# Altium PCB WorldClock.PcbDoc (part 7 of 13)
Units mil, origin at the board's own origin, x right, y up, seen from the top; angles counter-clockwise.
Board outline 3700 x 3850 mil, 2 copper layers (Top Layer, Bottom Layer); 227 components, 134 nets, 1324 pads, 248 vias.
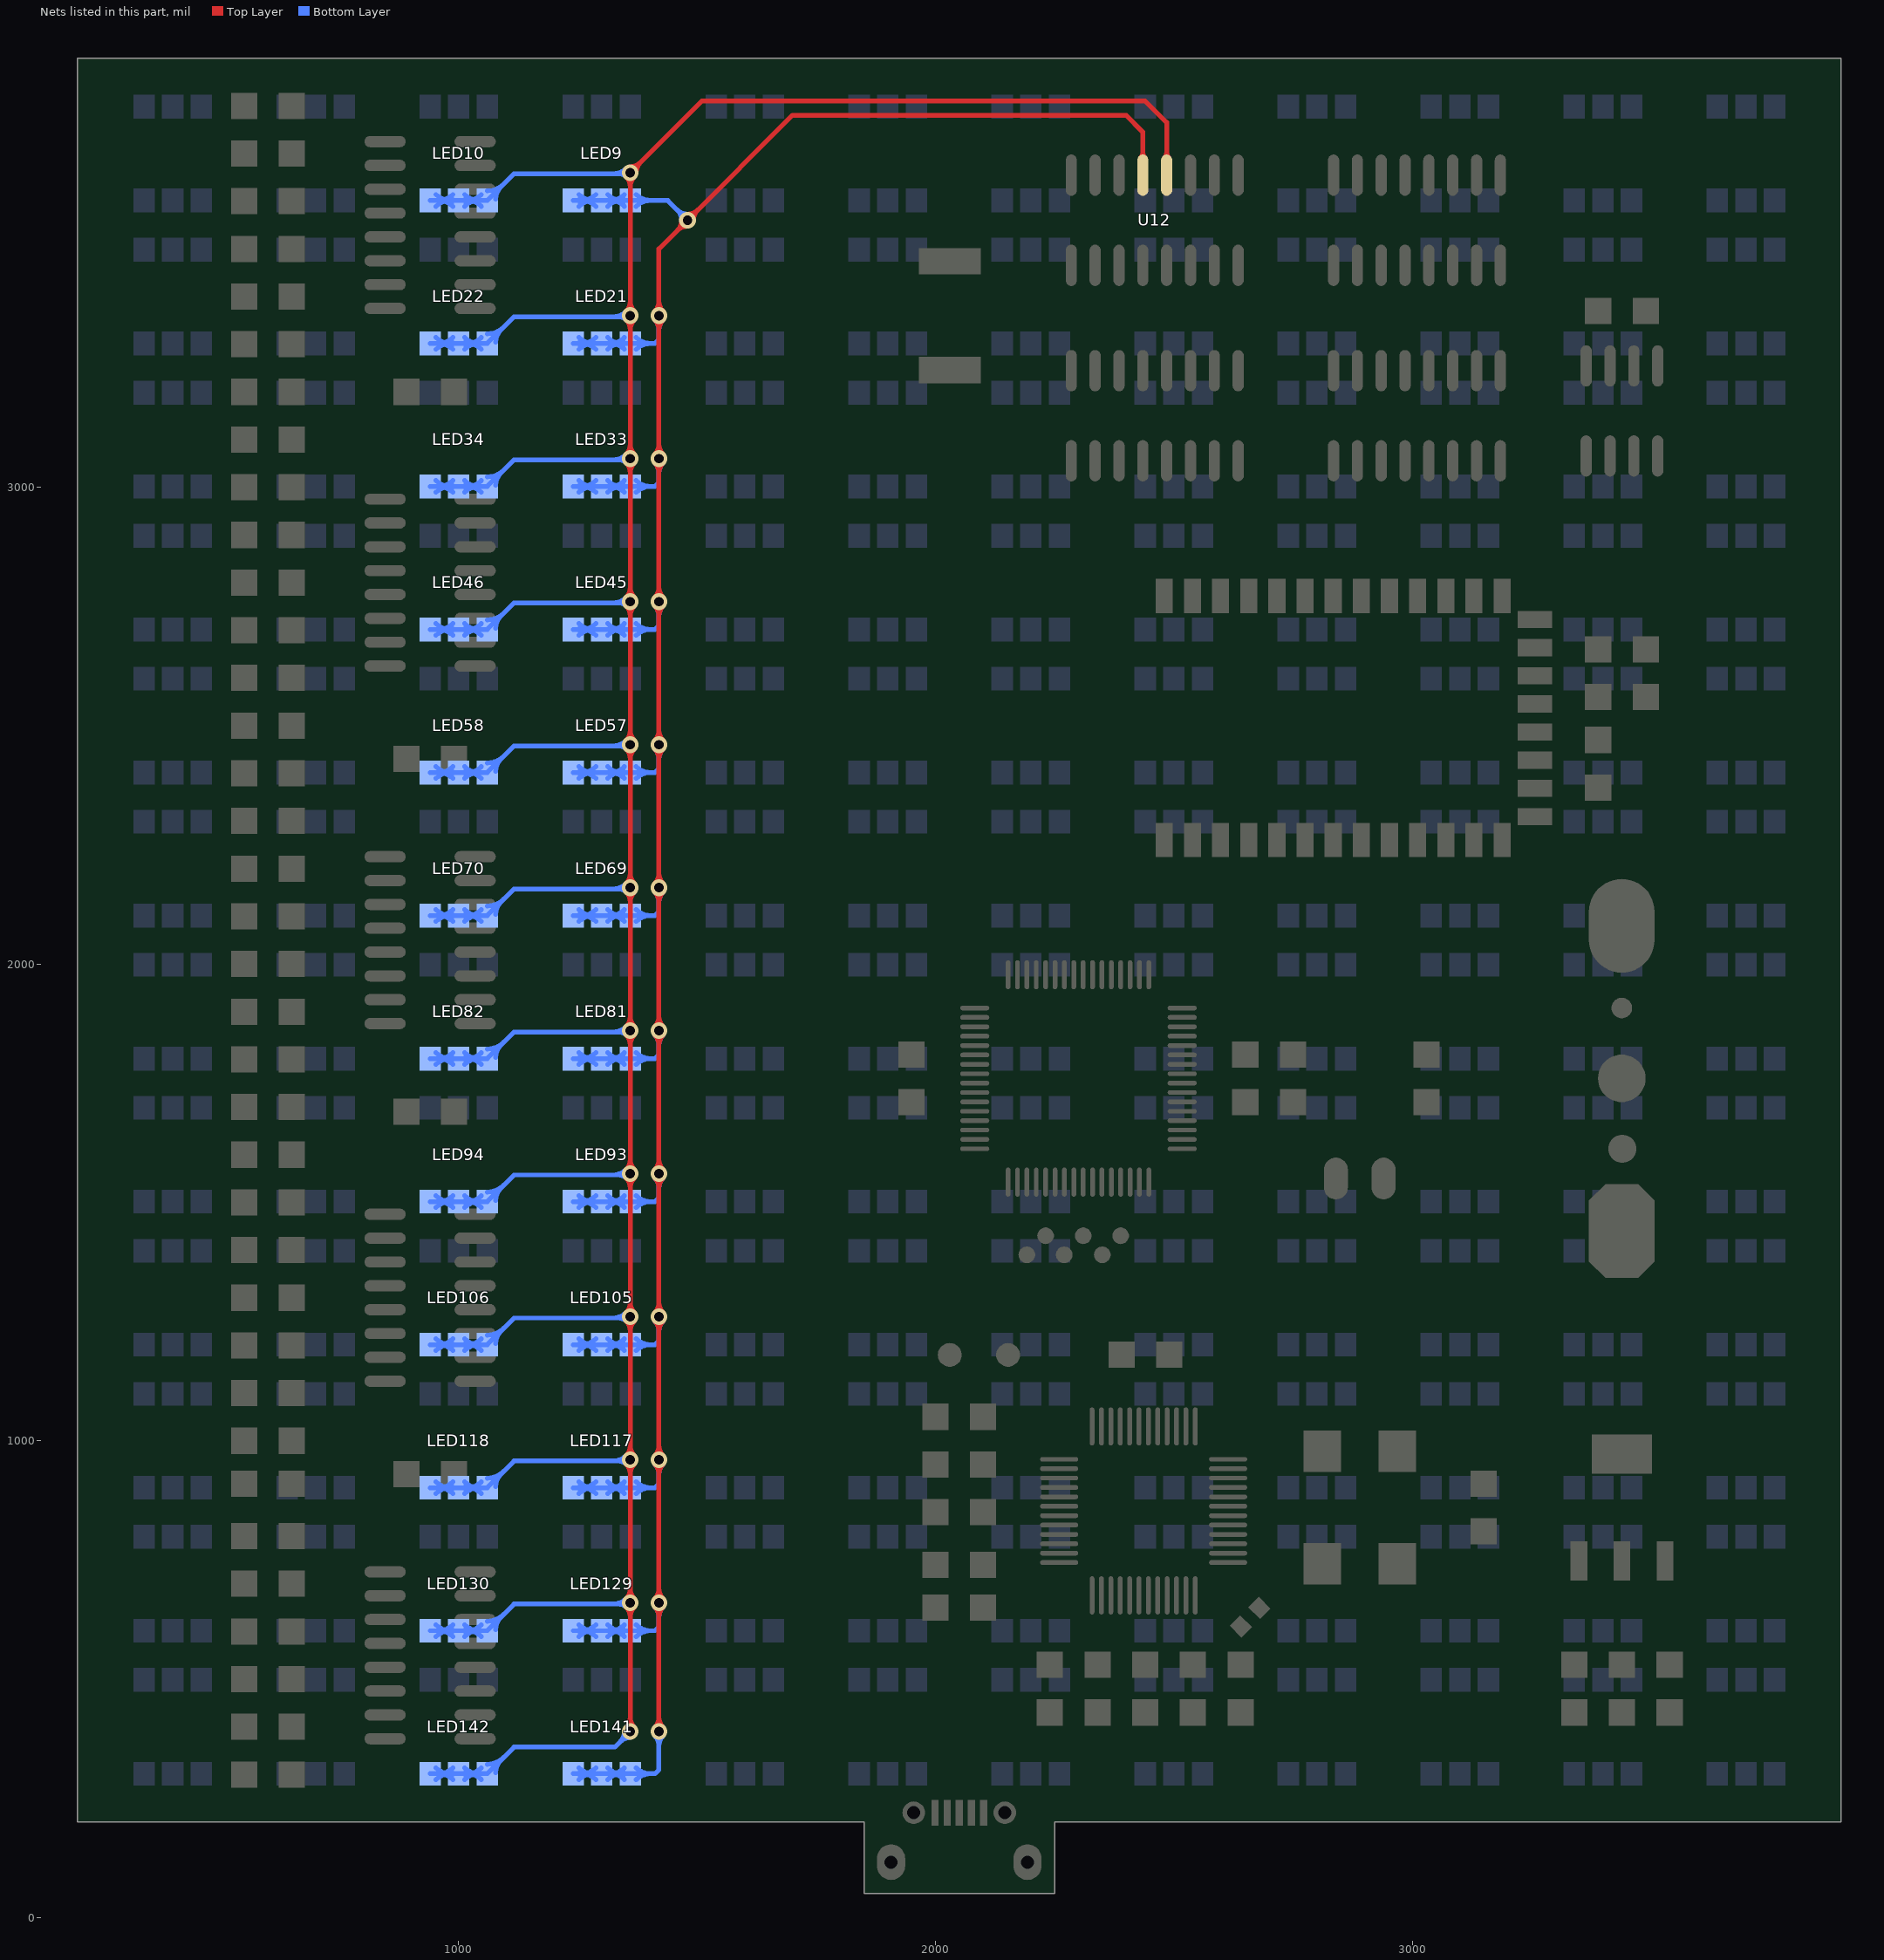
[diagram p7: the nets of this part, all layers, seen from the top]

## Via types
v1: diameter 35, hole 20, Top Layer to Bottom Layer, tented both sides, 213 vias
v2: diameter 24, hole 12, Top Layer to Bottom Layer, tented both sides, 35 vias

## Nets (pads, with @x,y where several pads share a name; then routed paths per layer and width w, separated by ;. In a path a pad name is that pad's centre, name@x,y a point inside that pad or via, vN(x,y) a via of type N, cw(c..) or ccw(c..) an arc to the next point about the centre after c; other vN are vias at no path point) (continued)
CH9: LED9.4 LED9.5 LED9.6 LED21.4 LED21.5 LED21.6 LED33.4 LED33.5 LED33.6 LED45.4 LED45.5 LED45.6 LED57.4 LED57.5 LED57.6 LED69.4 LED69.5 LED69.6 LED81.4 LED81.5 LED81.6 LED93.4 LED93.5 LED93.6 LED105.4 LED105.5 LED105.6 LED117.4 LED117.5 LED117.6 LED129.4 LED129.5 LED129.6 LED141.4 LED141.5 LED141.6 U12.13 | length 14193
  Top Layer w10: v1@1411.16,398.84 ccw(c1389.82,420.18) 1420,420.18 ccw(c1450.18,420.18) v1@1428.84,398.84 ; v1@1411.16,651.16 cw(c1389.82,629.82) 1420,629.82 cw(c1450.18,629.82) v1@1428.84,651.16 ; v1@1411.16,668.84 ccw(c1389.82,690.18) 1420,690.18 ccw(c1450.18,690.18) v1@1428.84,668.84 ; v1@1411.16,951.16 cw(c1389.82,929.82) 1420,929.82 cw(c1450.18,929.82) v1@1428.84,951.16 ; v1@1411.16,968.84 ccw(c1389.82,990.18) 1420,990.18 ccw(c1450.18,990.18) v1@1428.84,968.84 ; v1@1411.16,1251.16 cw(c1389.82,1229.82) 1420,1229.82 cw(c1450.18,1229.82) v1@1428.84,1251.16 ; v1@1411.16,1268.84 ccw(c1389.82,1290.18) 1420,1290.18 ccw(c1450.18,1290.18) v1@1428.84,1268.84 ; v1@1411.16,1551.16 cw(c1389.82,1529.82) 1420,1529.82 cw(c1450.18,1529.82) v1@1428.84,1551.16 ; v1@1411.16,1568.84 ccw(c1389.82,1590.18) 1420,1590.18 ccw(c1450.18,1590.18) v1@1428.84,1568.84 ; v1@1411.16,1851.16 cw(c1389.82,1829.82) 1420,1829.82 cw(c1450.18,1829.82) v1@1428.84,1851.16 ; v1@1411.16,1868.84 ccw(c1389.82,1890.18) 1420,1890.18 ccw(c1450.18,1890.18) v1@1428.84,1868.84 ; v1@1411.16,2151.16 cw(c1389.82,2129.82) 1420,2129.82 cw(c1450.18,2129.82) v1@1428.84,2151.16 ; v1@1411.16,2168.84 ccw(c1389.82,2190.18) 1420,2190.18 ccw(c1450.18,2190.18) v1@1428.84,2168.84 ; v1@1411.16,2451.16 cw(c1389.82,2429.82) 1420,2429.82 cw(c1450.18,2429.82) v1@1428.84,2451.16 ; v1@1411.16,2468.84 ccw(c1389.82,2490.18) 1420,2490.18 ccw(c1450.18,2490.18) v1@1428.84,2468.84 ; v1@1411.16,2751.16 cw(c1389.82,2729.82) 1420,2729.82 cw(c1450.18,2729.82) v1@1428.84,2751.16 ; v1@1411.16,2768.84 ccw(c1389.82,2790.18) 1420,2790.18 ccw(c1450.18,2790.18) v1@1428.84,2768.84 ; v1@1411.16,3051.16 cw(c1389.82,3029.82) 1420,3029.82 cw(c1450.18,3029.82) v1@1428.84,3051.16 ; v1@1411.16,3068.84 ccw(c1389.82,3090.18) 1420,3090.18 ccw(c1450.18,3090.18) v1@1428.84,3068.84 ; v1@1411.16,3351.16 cw(c1389.82,3329.82) 1420,3329.82 cw(c1450.18,3329.82) v1@1428.84,3351.16 ; v1@1411.16,3368.84 ccw(c1389.82,3390.18) 1420,3390.18 ccw(c1450.18,3390.18) v1@1428.84,3368.84 ; v1(1420,390) v1(1420,660) v1(1420,960) v1(1420,1260) v1(1420,1560) v1(1420,1860) v1(1420,2160) v1(1420,2460) v1(1420,2760) v1(1420,3060) v1(1420,3360) 1420,3500 v1(1480,3560) 1700,3780 2400,3780 2435,3745 U12.13@2435,3654.49 ; v1@1467.5,3560 cw(c1437.32,3560) 1458.66,3538.66 cw(c1480,3517.32) v1@1480,3547.5 ; v1@1480,3572.5 ccw(c1480,3602.68) 1501.34,3581.34 ccw(c1522.68,3560) v1@1492.5,3560 ; U12.13@2430.18,3690.8 ccw(c2418.56,3702.43) 2435,3702.43 ccw(c2451.44,3702.43) U12.13@2439.82,3690.8
  Bottom Layer w10: LED141.6@1240,301.57 LED141.5@1300,301.57 LED141.4@1360,301.57 1411.57,301.57 1420,310 v1(1420,390) ; LED129.6@1240,601.57 LED129.5@1300,601.57 LED129.4@1360,601.57 1411.57,601.57 1420,610 v1(1420,660) ; LED117.6@1240,901.57 LED117.5@1300,901.57 LED117.4@1360,901.57 1411.57,901.57 1420,910 v1(1420,960) ; LED105.6@1240,1201.57 LED105.5@1300,1201.57 LED105.4@1360,1201.57 1411.57,1201.57 1420,1210 v1(1420,1260) ; LED93.6@1240,1501.57 LED93.5@1300,1501.57 LED93.4@1360,1501.57 1411.57,1501.57 1420,1510 v1(1420,1560) ; LED81.6@1240,1801.57 LED81.5@1300,1801.57 LED81.4@1360,1801.57 1411.57,1801.57 1420,1810 v1(1420,1860) ; LED69.6@1240,2101.57 LED69.5@1300,2101.57 LED69.4@1360,2101.57 1411.57,2101.57 1420,2110 v1(1420,2160) ; LED57.6@1240,2401.57 LED57.5@1300,2401.57 LED57.4@1360,2401.57 1411.57,2401.57 1420,2410 v1(1420,2460) ; LED45.6@1240,2701.57 LED45.5@1300,2701.57 LED45.4@1360,2701.57 1411.57,2701.57 1420,2710 v1(1420,2760) ; LED33.6@1240,3001.57 LED33.5@1300,3001.57 LED33.4@1360,3001.57 1411.57,3001.57 1420,3010 v1(1420,3060) ; LED21.6@1240,3301.57 LED21.5@1300,3301.57 LED21.4@1360,3301.57 1411.57,3301.57 1420,3310 v1(1420,3360) ; LED9.6@1240,3601.57 LED9.5@1300,3601.57 LED9.4@1360,3601.57 1438.43,3601.57 v1(1480,3560) ; LED141.6@1252.37,289.2 cw(c1282.25,259.33) 1282.25,301.57 cw(c1282.25,343.82) LED141.6@1252.37,313.95 ; LED129.6@1252.37,589.2 cw(c1282.25,559.33) 1282.25,601.57 cw(c1282.25,643.82) LED129.6@1252.37,613.95 ; LED117.6@1252.37,889.2 cw(c1282.25,859.33) 1282.25,901.57 cw(c1282.25,943.82) LED117.6@1252.37,913.95 ; LED105.6@1252.37,1189.2 cw(c1282.25,1159.33) 1282.25,1201.57 cw(c1282.25,1243.82) LED105.6@1252.37,1213.95 ; LED93.6@1252.37,1489.2 cw(c1282.25,1459.33) 1282.25,1501.57 cw(c1282.25,1543.82) LED93.6@1252.37,1513.95 ; LED81.6@1252.37,1789.2 cw(c1282.25,1759.33) 1282.25,1801.57 cw(c1282.25,1843.82) LED81.6@1252.37,1813.95 ; LED69.6@1252.37,2089.2 cw(c1282.25,2059.33) 1282.25,2101.57 cw(c1282.25,2143.82) LED69.6@1252.37,2113.95 ; LED57.6@1252.37,2389.2 cw(c1282.25,2359.33) 1282.25,2401.57 cw(c1282.25,2443.82) LED57.6@1252.37,2413.95 ; LED45.6@1252.37,2689.2 cw(c1282.25,2659.33) 1282.25,2701.57 cw(c1282.25,2743.82) LED45.6@1252.37,2713.95 ; LED33.6@1252.37,2989.2 cw(c1282.25,2959.33) 1282.25,3001.57 cw(c1282.25,3043.82) LED33.6@1252.37,3013.95 ; LED21.6@1252.37,3289.2 cw(c1282.25,3259.33) 1282.25,3301.57 cw(c1282.25,3343.82) LED21.6@1252.37,3313.95 ; LED9.6@1252.37,3589.2 cw(c1282.25,3559.33) 1282.25,3601.57 cw(c1282.25,3643.82) LED9.6@1252.37,3613.95 ; LED141.6@1255.16,295.32 cw(c1271.02,286.17) 1266.28,303.86 ; LED141.6@1255.16,307.82 ccw(c1271.02,316.98) 1266.28,299.29 ; LED129.6@1255.16,595.32 cw(c1271.02,586.17) 1266.28,603.86 ; LED129.6@1255.16,607.82 ccw(c1271.02,616.98) 1266.28,599.29 ; LED117.6@1255.16,895.32 cw(c1271.02,886.17) 1266.28,903.86 ; LED117.6@1255.16,907.82 ccw(c1271.02,916.98) 1266.28,899.29 ; LED105.6@1255.16,1195.32 cw(c1271.02,1186.17) 1266.28,1203.86 ; LED105.6@1255.16,1207.82 ccw(c1271.02,1216.98) 1266.28,1199.29 ; LED93.6@1255.16,1495.32 cw(c1271.02,1486.17) 1266.28,1503.86 ; LED93.6@1255.16,1507.82 ccw(c1271.02,1516.98) 1266.28,1499.29 ; LED81.6@1255.16,1795.32 cw(c1271.02,1786.17) 1266.28,1803.86 ; LED81.6@1255.16,1807.82 ccw(c1271.02,1816.98) 1266.28,1799.29 ; LED69.6@1255.16,2095.32 cw(c1271.02,2086.17) 1266.28,2103.86 ; LED69.6@1255.16,2107.82 ccw(c1271.02,2116.98) 1266.28,2099.29 ; LED57.6@1255.16,2395.32 cw(c1271.02,2386.17) 1266.28,2403.86 ; LED57.6@1255.16,2407.82 ccw(c1271.02,2416.98) 1266.28,2399.29 ; LED45.6@1255.16,2695.32 cw(c1271.02,2686.17) 1266.28,2703.86 ; LED45.6@1255.16,2707.82 ccw(c1271.02,2716.98) 1266.28,2699.29 ; LED33.6@1255.16,2995.32 cw(c1271.02,2986.17) 1266.28,3003.86 ; LED33.6@1255.16,3007.82 ccw(c1271.02,3016.98) 1266.28,2999.29 ; LED21.6@1255.16,3295.32 cw(c1271.02,3286.17) 1266.28,3303.86 ; LED21.6@1255.16,3307.82 ccw(c1271.02,3316.98) 1266.28,3299.29 ; LED9.6@1255.16,3595.32 cw(c1271.02,3586.17) 1266.28,3603.86 ; LED9.6@1255.16,3607.82 ccw(c1271.02,3616.98) 1266.28,3599.29 ; LED141.6@1256.56,293.41 cw(c1264.87,290.57) 1267.15,299.06 ; LED141.6@1256.56,309.74 ccw(c1264.87,312.58) 1267.15,304.09 ; LED129.6@1256.56,593.41 cw(c1264.87,590.57) 1267.15,599.06 ; LED129.6@1256.56,609.74 ccw(c1264.87,612.58) 1267.15,604.09 ; LED117.6@1256.56,893.41 cw(c1264.87,890.57) 1267.15,899.06 ; LED117.6@1256.56,909.74 ccw(c1264.87,912.58) 1267.15,904.09 ; LED105.6@1256.56,1193.41 cw(c1264.87,1190.57) 1267.15,1199.06 ; LED105.6@1256.56,1209.74 ccw(c1264.87,1212.58) 1267.15,1204.09 ; LED93.6@1256.56,1493.41 cw(c1264.87,1490.57) 1267.15,1499.06 ; LED93.6@1256.56,1509.74 ccw(c1264.87,1512.58) 1267.15,1504.09 ; LED81.6@1256.56,1793.41 cw(c1264.87,1790.57) 1267.15,1799.06 ; LED81.6@1256.56,1809.74 ccw(c1264.87,1812.58) 1267.15,1804.09 ; LED69.6@1256.56,2093.41 cw(c1264.87,2090.57) 1267.15,2099.06 ; LED69.6@1256.56,2109.74 ccw(c1264.87,2112.58) 1267.15,2104.09 ; LED57.6@1256.56,2393.41 cw(c1264.87,2390.57) 1267.15,2399.06 ; LED57.6@1256.56,2409.74 ccw(c1264.87,2412.58) 1267.15,2404.09 ; LED45.6@1256.56,2693.41 cw(c1264.87,2690.57) 1267.15,2699.06 ; LED45.6@1256.56,2709.74 ccw(c1264.87,2712.58) 1267.15,2704.09 ; LED33.6@1256.56,2993.41 cw(c1264.87,2990.57) 1267.15,2999.06 ; LED33.6@1256.56,3009.74 ccw(c1264.87,3012.58) 1267.15,3004.09 ; LED21.6@1256.56,3293.41 cw(c1264.87,3290.57) 1267.15,3299.06 ; LED21.6@1256.56,3309.74 ccw(c1264.87,3312.58) 1267.15,3304.09 ; LED9.6@1256.56,3593.41 cw(c1264.87,3590.57) 1267.15,3599.06 ; LED9.6@1256.56,3609.74 ccw(c1264.87,3612.58) 1267.15,3604.09 ; LED141.5@1287.63,289.2 ccw(c1257.75,259.33) 1257.75,301.57 ccw(c1257.75,343.82) LED141.5@1287.63,313.95 ; LED129.5@1287.63,589.2 ccw(c1257.75,559.33) 1257.75,601.57 ccw(c1257.75,643.82) LED129.5@1287.63,613.95 ; LED117.5@1287.63,889.2 ccw(c1257.75,859.33) 1257.75,901.57 ccw(c1257.75,943.82) LED117.5@1287.63,913.95 ; LED105.5@1287.63,1189.2 ccw(c1257.75,1159.33) 1257.75,1201.57 ccw(c1257.75,1243.82) LED105.5@1287.63,1213.95 ; LED93.5@1287.63,1489.2 ccw(c1257.75,1459.33) 1257.75,1501.57 ccw(c1257.75,1543.82) LED93.5@1287.63,1513.95 ; LED81.5@1287.63,1789.2 ccw(c1257.75,1759.33) 1257.75,1801.57 ccw(c1257.75,1843.82) LED81.5@1287.63,1813.95 ; LED69.5@1287.63,2089.2 ccw(c1257.75,2059.33) 1257.75,2101.57 ccw(c1257.75,2143.82) LED69.5@1287.63,2113.95 ; LED57.5@1287.63,2389.2 ccw(c1257.75,2359.33) 1257.75,2401.57 ccw(c1257.75,2443.82) LED57.5@1287.63,2413.95 ; LED45.5@1287.63,2689.2 ccw(c1257.75,2659.33) 1257.75,2701.57 ccw(c1257.75,2743.82) LED45.5@1287.63,2713.95 ; LED33.5@1287.63,2989.2 ccw(c1257.75,2959.33) 1257.75,3001.57 ccw(c1257.75,3043.82) LED33.5@1287.63,3013.95 ; LED21.5@1287.63,3289.2 ccw(c1257.75,3259.33) 1257.75,3301.57 ccw(c1257.75,3343.82) LED21.5@1287.63,3313.95 ; LED9.5@1287.63,3589.2 ccw(c1257.75,3559.33) 1257.75,3601.57 ccw(c1257.75,3643.82) LED9.5@1287.63,3613.95 ; LED141.5@1312.37,289.2 cw(c1342.25,259.33) 1342.25,301.57 cw(c1342.25,343.82) LED141.5@1312.37,313.95 ; LED129.5@1312.37,589.2 cw(c1342.25,559.33) 1342.25,601.57 cw(c1342.25,643.82) LED129.5@1312.37,613.95 ; LED117.5@1312.37,889.2 cw(c1342.25,859.33) 1342.25,901.57 cw(c1342.25,943.82) LED117.5@1312.37,913.95 ; LED105.5@1312.37,1189.2 cw(c1342.25,1159.33) 1342.25,1201.57 cw(c1342.25,1243.82) LED105.5@1312.37,1213.95 ; LED93.5@1312.37,1489.2 cw(c1342.25,1459.33) 1342.25,1501.57 cw(c1342.25,1543.82) LED93.5@1312.37,1513.95 ; LED81.5@1312.37,1789.2 cw(c1342.25,1759.33) 1342.25,1801.57 cw(c1342.25,1843.82) LED81.5@1312.37,1813.95 ; LED69.5@1312.37,2089.2 cw(c1342.25,2059.33) 1342.25,2101.57 cw(c1342.25,2143.82) LED69.5@1312.37,2113.95 ; LED57.5@1312.37,2389.2 cw(c1342.25,2359.33) 1342.25,2401.57 cw(c1342.25,2443.82) LED57.5@1312.37,2413.95 ; LED45.5@1312.37,2689.2 cw(c1342.25,2659.33) 1342.25,2701.57 cw(c1342.25,2743.82) LED45.5@1312.37,2713.95 ; LED33.5@1312.37,2989.2 cw(c1342.25,2959.33) 1342.25,3001.57 cw(c1342.25,3043.82) LED33.5@1312.37,3013.95 ; LED21.5@1312.37,3289.2 cw(c1342.25,3259.33) 1342.25,3301.57 cw(c1342.25,3343.82) LED21.5@1312.37,3313.95 ; LED9.5@1312.37,3589.2 cw(c1342.25,3559.33) 1342.25,3601.57 cw(c1342.25,3643.82) LED9.5@1312.37,3613.95 ; 1332.85,299.06 cw(c1335.13,290.57) LED141.4@1343.44,293.41 ; 1332.85,304.09 ccw(c1335.13,312.58) LED141.4@1343.44,309.74 ; 1332.85,599.06 cw(c1335.13,590.57) LED129.4@1343.44,593.41 ; 1332.85,604.09 ccw(c1335.13,612.58) LED129.4@1343.44,609.74 ; 1332.85,899.06 cw(c1335.13,890.57) LED117.4@1343.44,893.41 ; 1332.85,904.09 ccw(c1335.13,912.58) LED117.4@1343.44,909.74 ; 1332.85,1199.06 cw(c1335.13,1190.57) LED105.4@1343.44,1193.41 ; 1332.85,1204.09 ccw(c1335.13,1212.58) LED105.4@1343.44,1209.74 ; 1332.85,1499.06 cw(c1335.13,1490.57) LED93.4@1343.44,1493.41 ; 1332.85,1504.09 ccw(c1335.13,1512.58) LED93.4@1343.44,1509.74 ; 1332.85,1799.06 cw(c1335.13,1790.57) LED81.4@1343.44,1793.41 ; 1332.85,1804.09 ccw(c1335.13,1812.58) LED81.4@1343.44,1809.74 ; 1332.85,2099.06 cw(c1335.13,2090.57) LED69.4@1343.44,2093.41 ; 1332.85,2104.09 ccw(c1335.13,2112.58) LED69.4@1343.44,2109.74 ; 1332.85,2399.06 cw(c1335.13,2390.57) LED57.4@1343.44,2393.41 ; 1332.85,2404.09 ccw(c1335.13,2412.58) LED57.4@1343.44,2409.74 ; 1332.85,2699.06 cw(c1335.13,2690.57) LED45.4@1343.44,2693.41 ; 1332.85,2704.09 ccw(c1335.13,2712.58) LED45.4@1343.44,2709.74 ; 1332.85,2999.06 cw(c1335.13,2990.57) LED33.4@1343.44,2993.41 ; 1332.85,3004.09 ccw(c1335.13,3012.58) LED33.4@1343.44,3009.74 ; 1332.85,3299.06 cw(c1335.13,3290.57) LED21.4@1343.44,3293.41 ; 1332.85,3304.09 ccw(c1335.13,3312.58) LED21.4@1343.44,3309.74 ; 1332.85,3599.06 cw(c1335.13,3590.57) LED9.4@1343.44,3593.41 ; 1332.85,3604.09 ccw(c1335.13,3612.58) LED9.4@1343.44,3609.74 ; 1333.72,299.29 ccw(c1328.98,316.98) LED141.4@1344.84,307.82 ; 1333.72,303.86 cw(c1328.98,286.17) LED141.4@1344.84,295.32 ; 1333.72,599.29 ccw(c1328.98,616.98) LED129.4@1344.84,607.82 ; 1333.72,603.86 cw(c1328.98,586.17) LED129.4@1344.84,595.32 ; 1333.72,899.29 ccw(c1328.98,916.98) LED117.4@1344.84,907.82 ; 1333.72,903.86 cw(c1328.98,886.17) LED117.4@1344.84,895.32 ; 1333.72,1199.29 ccw(c1328.98,1216.98) LED105.4@1344.84,1207.82 ; 1333.72,1203.86 cw(c1328.98,1186.17) LED105.4@1344.84,1195.32 ; 1333.72,1499.29 ccw(c1328.98,1516.98) LED93.4@1344.84,1507.82 ; 1333.72,1503.86 cw(c1328.98,1486.17) LED93.4@1344.84,1495.32 ; 1333.72,1799.29 ccw(c1328.98,1816.98) LED81.4@1344.84,1807.82 ; 1333.72,1803.86 cw(c1328.98,1786.17) LED81.4@1344.84,1795.32 ; 1333.72,2099.29 ccw(c1328.98,2116.98) LED69.4@1344.84,2107.82 ; 1333.72,2103.86 cw(c1328.98,2086.17) LED69.4@1344.84,2095.32 ; 1333.72,2399.29 ccw(c1328.98,2416.98) LED57.4@1344.84,2407.82 ; 1333.72,2403.86 cw(c1328.98,2386.17) LED57.4@1344.84,2395.32 ; 1333.72,2699.29 ccw(c1328.98,2716.98) LED45.4@1344.84,2707.82 ; 1333.72,2703.86 cw(c1328.98,2686.17) LED45.4@1344.84,2695.32 ; 1333.72,2999.29 ccw(c1328.98,3016.98) LED33.4@1344.84,3007.82 ; 1333.72,3003.86 cw(c1328.98,2986.17) LED33.4@1344.84,2995.32 ; 1333.72,3299.29 ccw(c1328.98,3316.98) LED21.4@1344.84,3307.82 ; 1333.72,3303.86 cw(c1328.98,3286.17) LED21.4@1344.84,3295.32 ; 1333.72,3599.29 ccw(c1328.98,3616.98) LED9.4@1344.84,3607.82 ; 1333.72,3603.86 cw(c1328.98,3586.17) LED9.4@1344.84,3595.32 ; LED141.4@1347.63,289.2 ccw(c1317.75,259.33) 1317.75,301.57 ccw(c1317.75,343.82) LED141.4@1347.63,313.95 ; LED129.4@1347.63,589.2 ccw(c1317.75,559.33) 1317.75,601.57 ccw(c1317.75,643.82) LED129.4@1347.63,613.95 ; LED117.4@1347.63,889.2 ccw(c1317.75,859.33) 1317.75,901.57 ccw(c1317.75,943.82) LED117.4@1347.63,913.95 ; LED105.4@1347.63,1189.2 ccw(c1317.75,1159.33) 1317.75,1201.57 ccw(c1317.75,1243.82) LED105.4@1347.63,1213.95 ; LED93.4@1347.63,1489.2 ccw(c1317.75,1459.33) 1317.75,1501.57 ccw(c1317.75,1543.82) LED93.4@1347.63,1513.95 ; LED81.4@1347.63,1789.2 ccw(c1317.75,1759.33) 1317.75,1801.57 ccw(c1317.75,1843.82) LED81.4@1347.63,1813.95 ; LED69.4@1347.63,2089.2 ccw(c1317.75,2059.33) 1317.75,2101.57 ccw(c1317.75,2143.82) LED69.4@1347.63,2113.95 ; LED57.4@1347.63,2389.2 ccw(c1317.75,2359.33) 1317.75,2401.57 ccw(c1317.75,2443.82) LED57.4@1347.63,2413.95 ; LED45.4@1347.63,2689.2 ccw(c1317.75,2659.33) 1317.75,2701.57 ccw(c1317.75,2743.82) LED45.4@1347.63,2713.95 ; LED33.4@1347.63,2989.2 ccw(c1317.75,2959.33) 1317.75,3001.57 ccw(c1317.75,3043.82) LED33.4@1347.63,3013.95 ; LED21.4@1347.63,3289.2 ccw(c1317.75,3259.33) 1317.75,3301.57 ccw(c1317.75,3343.82) LED21.4@1347.63,3313.95 ; LED9.4@1347.63,3589.2 ccw(c1317.75,3559.33) 1317.75,3601.57 ccw(c1317.75,3643.82) LED9.4@1347.63,3613.95 ; LED141.4@1372.37,289.2 cw(c1402.25,259.33) 1402.25,301.57 cw(c1402.25,343.82) LED141.4@1372.37,313.95 ; LED129.4@1372.37,589.2 cw(c1402.25,559.33) 1402.25,601.57 cw(c1402.25,643.82) LED129.4@1372.37,613.95 ; LED117.4@1372.37,889.2 cw(c1402.25,859.33) 1402.25,901.57 cw(c1402.25,943.82) LED117.4@1372.37,913.95 ; LED105.4@1372.37,1189.2 cw(c1402.25,1159.33) 1402.25,1201.57 cw(c1402.25,1243.82) LED105.4@1372.37,1213.95 ; LED93.4@1372.37,1489.2 cw(c1402.25,1459.33) 1402.25,1501.57 cw(c1402.25,1543.82) LED93.4@1372.37,1513.95 ; LED81.4@1372.37,1789.2 cw(c1402.25,1759.33) 1402.25,1801.57 cw(c1402.25,1843.82) LED81.4@1372.37,1813.95 ; LED69.4@1372.37,2089.2 cw(c1402.25,2059.33) 1402.25,2101.57 cw(c1402.25,2143.82) LED69.4@1372.37,2113.95 ; LED57.4@1372.37,2389.2 cw(c1402.25,2359.33) 1402.25,2401.57 cw(c1402.25,2443.82) LED57.4@1372.37,2413.95 ; LED45.4@1372.37,2689.2 cw(c1402.25,2659.33) 1402.25,2701.57 cw(c1402.25,2743.82) LED45.4@1372.37,2713.95 ; LED33.4@1372.37,2989.2 cw(c1402.25,2959.33) 1402.25,3001.57 cw(c1402.25,3043.82) LED33.4@1372.37,3013.95 ; LED21.4@1372.37,3289.2 cw(c1402.25,3259.33) 1402.25,3301.57 cw(c1402.25,3343.82) LED21.4@1372.37,3313.95 ; LED9.4@1372.37,3589.2 cw(c1402.25,3559.33) 1402.25,3601.57 cw(c1402.25,3643.82) LED9.4@1372.37,3613.95 ; v1@1411.16,381.16 cw(c1389.82,359.82) 1420,359.82 cw(c1450.18,359.82) v1@1428.84,381.16 ; v1@1411.16,651.16 cw(c1389.82,629.82) 1420,629.82 cw(c1450.18,629.82) v1@1428.84,651.16 ; v1@1411.16,951.16 cw(c1389.82,929.82) 1420,929.82 cw(c1450.18,929.82) v1@1428.84,951.16 ; v1@1411.16,1251.16 cw(c1389.82,1229.82) 1420,1229.82 cw(c1450.18,1229.82) v1@1428.84,1251.16 ; v1@1411.16,1551.16 cw(c1389.82,1529.82) 1420,1529.82 cw(c1450.18,1529.82) v1@1428.84,1551.16 ; v1@1411.16,1851.16 cw(c1389.82,1829.82) 1420,1829.82 cw(c1450.18,1829.82) v1@1428.84,1851.16 ; v1@1411.16,2151.16 cw(c1389.82,2129.82) 1420,2129.82 cw(c1450.18,2129.82) v1@1428.84,2151.16 ; v1@1411.16,2451.16 cw(c1389.82,2429.82) 1420,2429.82 cw(c1450.18,2429.82) v1@1428.84,2451.16 ; v1@1411.16,2751.16 cw(c1389.82,2729.82) 1420,2729.82 cw(c1450.18,2729.82) v1@1428.84,2751.16 ; v1@1411.16,3051.16 cw(c1389.82,3029.82) 1420,3029.82 cw(c1450.18,3029.82) v1@1428.84,3051.16 ; v1@1411.16,3351.16 cw(c1389.82,3329.82) 1420,3329.82 cw(c1450.18,3329.82) v1@1428.84,3351.16 ; v1@1467.5,3560 ccw(c1437.32,3560) 1458.66,3581.34 ccw(c1480,3602.68) v1@1480,3572.5
CH10: LED10.4 LED10.5 LED10.6 LED22.4 LED22.5 LED22.6 LED34.4 LED34.5 LED34.6 LED46.4 LED46.5 LED46.6 LED58.4 LED58.5 LED58.6 LED70.4 LED70.5 LED70.6 LED82.4 LED82.5 LED82.6 LED94.4 LED94.5 LED94.6 LED106.4 LED106.5 LED106.6 LED118.4 LED118.5 LED118.6 LED130.4 LED130.5 LED130.6 LED142.4 LED142.5 LED142.6 U12.12 | length 16920.5
  Top Layer w10: v1@1351.16,398.84 ccw(c1329.82,420.18) 1360,420.18 ccw(c1390.18,420.18) v1@1368.84,398.84 ; v1@1351.16,651.16 cw(c1329.82,629.82) 1360,629.82 cw(c1390.18,629.82) v1@1368.84,651.16 ; v1@1351.16,668.84 ccw(c1329.82,690.18) 1360,690.18 ccw(c1390.18,690.18) v1@1368.84,668.84 ; v1@1351.16,951.16 cw(c1329.82,929.82) 1360,929.82 cw(c1390.18,929.82) v1@1368.84,951.16 ; v1@1351.16,968.84 ccw(c1329.82,990.18) 1360,990.18 ccw(c1390.18,990.18) v1@1368.84,968.84 ; v1@1351.16,1251.16 cw(c1329.82,1229.82) 1360,1229.82 cw(c1390.18,1229.82) v1@1368.84,1251.16 ; v1@1351.16,1268.84 ccw(c1329.82,1290.18) 1360,1290.18 ccw(c1390.18,1290.18) v1@1368.84,1268.84 ; v1@1351.16,1551.16 cw(c1329.82,1529.82) 1360,1529.82 cw(c1390.18,1529.82) v1@1368.84,1551.16 ; v1@1351.16,1568.84 ccw(c1329.82,1590.18) 1360,1590.18 ccw(c1390.18,1590.18) v1@1368.84,1568.84 ; v1@1351.16,1851.16 cw(c1329.82,1829.82) 1360,1829.82 cw(c1390.18,1829.82) v1@1368.84,1851.16 ; v1@1351.16,1868.84 ccw(c1329.82,1890.18) 1360,1890.18 ccw(c1390.18,1890.18) v1@1368.84,1868.84 ; v1@1351.16,2151.16 cw(c1329.82,2129.82) 1360,2129.82 cw(c1390.18,2129.82) v1@1368.84,2151.16 ; v1@1351.16,2168.84 ccw(c1329.82,2190.18) 1360,2190.18 ccw(c1390.18,2190.18) v1@1368.84,2168.84 ; v1@1351.16,2451.16 cw(c1329.82,2429.82) 1360,2429.82 cw(c1390.18,2429.82) v1@1368.84,2451.16 ; v1@1351.16,2468.84 ccw(c1329.82,2490.18) 1360,2490.18 ccw(c1390.18,2490.18) v1@1368.84,2468.84 ; v1@1351.16,2751.16 cw(c1329.82,2729.82) 1360,2729.82 cw(c1390.18,2729.82) v1@1368.84,2751.16 ; v1@1351.16,2768.84 ccw(c1329.82,2790.18) 1360,2790.18 ccw(c1390.18,2790.18) v1@1368.84,2768.84 ; v1@1351.16,3051.16 cw(c1329.82,3029.82) 1360,3029.82 cw(c1390.18,3029.82) v1@1368.84,3051.16 ; v1@1351.16,3068.84 ccw(c1329.82,3090.18) 1360,3090.18 ccw(c1390.18,3090.18) v1@1368.84,3068.84 ; v1@1351.16,3351.16 cw(c1329.82,3329.82) 1360,3329.82 cw(c1390.18,3329.82) v1@1368.84,3351.16 ; v1@1351.16,3368.84 ccw(c1329.82,3390.18) 1360,3390.18 ccw(c1390.18,3390.18) v1@1368.84,3368.84 ; v1@1351.16,3651.16 cw(c1329.82,3629.82) 1360,3629.82 cw(c1390.18,3629.82) v1@1368.84,3651.16 ; v1(1360,390) v1(1360,660) v1(1360,960) v1(1360,1260) v1(1360,1560) v1(1360,1860) v1(1360,2160) v1(1360,2460) v1(1360,2760) v1(1360,3060) v1(1360,3360) v1(1360,3660) 1510,3810 2440,3810 2485,3765 U12.12@2485,3654.49 ; v1@1360,3672.5 ccw(c1360,3702.68) 1381.34,3681.34 ccw(c1402.68,3660) v1@1372.5,3660 ; U12.12@2480.18,3690.8 ccw(c2468.56,3702.43) 2485,3702.43 ccw(c2501.44,3702.43) U12.12@2489.82,3690.8
  Bottom Layer w10: LED142.6@940,301.57 LED142.5@1000,301.57 LED142.4@1060,301.57 1115.93,357.5 1327.5,357.5 v1(1360,390) ; LED130.6@940,601.57 LED130.5@1000,601.57 LED130.4@1060,601.57 1115.93,657.5 1357.5,657.5 v1(1360,660) ; LED118.6@940,901.57 LED118.5@1000,901.57 LED118.4@1060,901.57 1115.93,957.5 1357.5,957.5 v1(1360,960) ; LED106.6@940,1201.57 LED106.5@1000,1201.57 LED106.4@1060,1201.57 1115.93,1257.5 1357.5,1257.5 v1(1360,1260) ; LED94.6@940,1501.57 LED94.5@1000,1501.57 LED94.4@1060,1501.57 1115.93,1557.5 1357.5,1557.5 v1(1360,1560) ; LED82.6@940,1801.57 LED82.5@1000,1801.57 LED82.4@1060,1801.57 1115.93,1857.5 1357.5,1857.5 v1(1360,1860) ; LED70.6@940,2101.57 LED70.5@1000,2101.57 LED70.4@1060,2101.57 1115.93,2157.5 1357.5,2157.5 v1(1360,2160) ; LED58.6@940,2401.57 LED58.5@1000,2401.57 LED58.4@1060,2401.57 1115.93,2457.5 1357.5,2457.5 v1(1360,2460) ; LED46.6@940,2701.57 LED46.5@1000,2701.57 LED46.4@1060,2701.57 1115.93,2757.5 1357.5,2757.5 v1(1360,2760) ; LED34.6@940,3001.57 LED34.5@1000,3001.57 LED34.4@1060,3001.57 1115.93,3057.5 1357.5,3057.5 v1(1360,3060) ; LED22.6@940,3301.57 LED22.5@1000,3301.57 LED22.4@1060,3301.57 1115.93,3357.5 1357.5,3357.5 v1(1360,3360) ; LED10.6@940,3601.57 LED10.5@1000,3601.57 LED10.4@1060,3601.57 1115.93,3657.5 1357.5,3657.5 v1(1360,3660) ; LED142.6@952.37,289.2 cw(c982.25,259.33) 982.25,301.57 cw(c982.25,343.82) LED142.6@952.37,313.95 ; LED130.6@952.37,589.2 cw(c982.25,559.33) 982.25,601.57 cw(c982.25,643.82) LED130.6@952.37,613.95 ; LED118.6@952.37,889.2 cw(c982.25,859.33) 982.25,901.57 cw(c982.25,943.82) LED118.6@952.37,913.95 ; LED106.6@952.37,1189.2 cw(c982.25,1159.33) 982.25,1201.57 cw(c982.25,1243.82) LED106.6@952.37,1213.95 ; LED94.6@952.37,1489.2 cw(c982.25,1459.33) 982.25,1501.57 cw(c982.25,1543.82) LED94.6@952.37,1513.95 ; LED82.6@952.37,1789.2 cw(c982.25,1759.33) 982.25,1801.57 cw(c982.25,1843.82) LED82.6@952.37,1813.95 ; LED70.6@952.37,2089.2 cw(c982.25,2059.33) 982.25,2101.57 cw(c982.25,2143.82) LED70.6@952.37,2113.95 ; LED58.6@952.37,2389.2 cw(c982.25,2359.33) 982.25,2401.57 cw(c982.25,2443.82) LED58.6@952.37,2413.95 ; LED46.6@952.37,2689.2 cw(c982.25,2659.33) 982.25,2701.57 cw(c982.25,2743.82) LED46.6@952.37,2713.95 ; LED34.6@952.37,2989.2 cw(c982.25,2959.33) 982.25,3001.57 cw(c982.25,3043.82) LED34.6@952.37,3013.95 ; LED22.6@952.37,3289.2 cw(c982.25,3259.33) 982.25,3301.57 cw(c982.25,3343.82) LED22.6@952.37,3313.95 ; LED10.6@952.37,3589.2 cw(c982.25,3559.33) 982.25,3601.57 cw(c982.25,3643.82) LED10.6@952.37,3613.95 ; 972.85,299.06 cw(c975.13,290.57) LED142.5@983.44,293.41 ; 972.85,304.09 ccw(c975.13,312.58) LED142.5@983.44,309.74 ; 972.85,599.06 cw(c975.13,590.57) LED130.5@983.44,593.41 ; 972.85,604.09 ccw(c975.13,612.58) LED130.5@983.44,609.74 ; 972.85,899.06 cw(c975.13,890.57) LED118.5@983.44,893.41 ; 972.85,904.09 ccw(c975.13,912.58) LED118.5@983.44,909.74 ; 972.85,1199.06 cw(c975.13,1190.57) LED106.5@983.44,1193.41 ; 972.85,1204.09 ccw(c975.13,1212.58) LED106.5@983.44,1209.74 ; 972.85,1499.06 cw(c975.13,1490.57) LED94.5@983.44,1493.41 ; 972.85,1504.09 ccw(c975.13,1512.58) LED94.5@983.44,1509.74 ; 972.85,1799.06 cw(c975.13,1790.57) LED82.5@983.44,1793.41 ; 972.85,1804.09 ccw(c975.13,1812.58) LED82.5@983.44,1809.74 ; 972.85,2099.06 cw(c975.13,2090.57) LED70.5@983.44,2093.41 ; 972.85,2104.09 ccw(c975.13,2112.58) LED70.5@983.44,2109.74 ; 972.85,2399.06 cw(c975.13,2390.57) LED58.5@983.44,2393.41 ; 972.85,2404.09 ccw(c975.13,2412.58) LED58.5@983.44,2409.74 ; 972.85,2699.06 cw(c975.13,2690.57) LED46.5@983.44,2693.41 ; 972.85,2704.09 ccw(c975.13,2712.58) LED46.5@983.44,2709.74 ; 972.85,2999.06 cw(c975.13,2990.57) LED34.5@983.44,2993.41 ; 972.85,3004.09 ccw(c975.13,3012.58) LED34.5@983.44,3009.74 ; 972.85,3299.06 cw(c975.13,3290.57) LED22.5@983.44,3293.41 ; 972.85,3304.09 ccw(c975.13,3312.58) LED22.5@983.44,3309.74 ; 972.85,3599.06 cw(c975.13,3590.57) LED10.5@983.44,3593.41 ; 972.85,3604.09 ccw(c975.13,3612.58) LED10.5@983.44,3609.74 ; 973.72,299.29 ccw(c968.98,316.98) LED142.5@984.84,307.82 ; 973.72,303.86 cw(c968.98,286.17) LED142.5@984.84,295.32 ; 973.72,599.29 ccw(c968.98,616.98) LED130.5@984.84,607.82 ; 973.72,603.86 cw(c968.98,586.17) LED130.5@984.84,595.32 ; 973.72,899.29 ccw(c968.98,916.98) LED118.5@984.84,907.82 ; 973.72,903.86 cw(c968.98,886.17) LED118.5@984.84,895.32 ; 973.72,1199.29 ccw(c968.98,1216.98) LED106.5@984.84,1207.82 ; 973.72,1203.86 cw(c968.98,1186.17) LED106.5@984.84,1195.32 ; 973.72,1499.29 ccw(c968.98,1516.98) LED94.5@984.84,1507.82 ; 973.72,1503.86 cw(c968.98,1486.17) LED94.5@984.84,1495.32 ; 973.72,1799.29 ccw(c968.98,1816.98) LED82.5@984.84,1807.82 ; 973.72,1803.86 cw(c968.98,1786.17) LED82.5@984.84,1795.32 ; 973.72,2099.29 ccw(c968.98,2116.98) LED70.5@984.84,2107.82 ; 973.72,2103.86 cw(c968.98,2086.17) LED70.5@984.84,2095.32 ; 973.72,2399.29 ccw(c968.98,2416.98) LED58.5@984.84,2407.82 ; 973.72,2403.86 cw(c968.98,2386.17) LED58.5@984.84,2395.32 ; 973.72,2699.29 ccw(c968.98,2716.98) LED46.5@984.84,2707.82 ; 973.72,2703.86 cw(c968.98,2686.17) LED46.5@984.84,2695.32 ; 973.72,2999.29 ccw(c968.98,3016.98) LED34.5@984.84,3007.82 ; 973.72,3003.86 cw(c968.98,2986.17) LED34.5@984.84,2995.32 ; 973.72,3299.29 ccw(c968.98,3316.98) LED22.5@984.84,3307.82 ; 973.72,3303.86 cw(c968.98,3286.17) LED22.5@984.84,3295.32 ; 973.72,3599.29 ccw(c968.98,3616.98) LED10.5@984.84,3607.82 ; 973.72,3603.86 cw(c968.98,3586.17) LED10.5@984.84,3595.32 ; LED142.5@987.63,289.2 ccw(c957.75,259.33) 957.75,301.57 ccw(c957.75,343.82) LED142.5@987.63,313.95 ; LED130.5@987.63,589.2 ccw(c957.75,559.33) 957.75,601.57 ccw(c957.75,643.82) LED130.5@987.63,613.95 ; LED118.5@987.63,889.2 ccw(c957.75,859.33) 957.75,901.57 ccw(c957.75,943.82) LED118.5@987.63,913.95 ; LED106.5@987.63,1189.2 ccw(c957.75,1159.33) 957.75,1201.57 ccw(c957.75,1243.82) LED106.5@987.63,1213.95 ; LED94.5@987.63,1489.2 ccw(c957.75,1459.33) 957.75,1501.57 ccw(c957.75,1543.82) LED94.5@987.63,1513.95 ; LED82.5@987.63,1789.2 ccw(c957.75,1759.33) 957.75,1801.57 ccw(c957.75,1843.82) LED82.5@987.63,1813.95 ; LED70.5@987.63,2089.2 ccw(c957.75,2059.33) 957.75,2101.57 ccw(c957.75,2143.82) LED70.5@987.63,2113.95 ; LED58.5@987.63,2389.2 ccw(c957.75,2359.33) 957.75,2401.57 ccw(c957.75,2443.82) LED58.5@987.63,2413.95 ; LED46.5@987.63,2689.2 ccw(c957.75,2659.33) 957.75,2701.57 ccw(c957.75,2743.82) LED46.5@987.63,2713.95 ; LED34.5@987.63,2989.2 ccw(c957.75,2959.33) 957.75,3001.57 ccw(c957.75,3043.82) LED34.5@987.63,3013.95 ; LED22.5@987.63,3289.2 ccw(c957.75,3259.33) 957.75,3301.57 ccw(c957.75,3343.82) LED22.5@987.63,3313.95 ; LED10.5@987.63,3589.2 ccw(c957.75,3559.33) 957.75,3601.57 ccw(c957.75,3643.82) LED10.5@987.63,3613.95 ; LED142.5@1012.37,289.2 cw(c1042.25,259.33) 1042.25,301.57 cw(c1042.25,343.82) LED142.5@1012.37,313.95 ; LED130.5@1012.37,589.2 cw(c1042.25,559.33) 1042.25,601.57 cw(c1042.25,643.82) LED130.5@1012.37,613.95 ; LED118.5@1012.37,889.2 cw(c1042.25,859.33) 1042.25,901.57 cw(c1042.25,943.82) LED118.5@1012.37,913.95 ; LED106.5@1012.37,1189.2 cw(c1042.25,1159.33) 1042.25,1201.57 cw(c1042.25,1243.82) LED106.5@1012.37,1213.95 ; LED94.5@1012.37,1489.2 cw(c1042.25,1459.33) 1042.25,1501.57 cw(c1042.25,1543.82) LED94.5@1012.37,1513.95 ; LED82.5@1012.37,1789.2 cw(c1042.25,1759.33) 1042.25,1801.57 cw(c1042.25,1843.82) LED82.5@1012.37,1813.95 ; LED70.5@1012.37,2089.2 cw(c1042.25,2059.33) 1042.25,2101.57 cw(c1042.25,2143.82) LED70.5@1012.37,2113.95 ; LED58.5@1012.37,2389.2 cw(c1042.25,2359.33) 1042.25,2401.57 cw(c1042.25,2443.82) LED58.5@1012.37,2413.95 ; LED46.5@1012.37,2689.2 cw(c1042.25,2659.33) 1042.25,2701.57 cw(c1042.25,2743.82) LED46.5@1012.37,2713.95 ; LED34.5@1012.37,2989.2 cw(c1042.25,2959.33) 1042.25,3001.57 cw(c1042.25,3043.82) LED34.5@1012.37,3013.95 ; LED22.5@1012.37,3289.2 cw(c1042.25,3259.33) 1042.25,3301.57 cw(c1042.25,3343.82) LED22.5@1012.37,3313.95 ; LED10.5@1012.37,3589.2 cw(c1042.25,3559.33) 1042.25,3601.57 cw(c1042.25,3643.82) LED10.5@1012.37,3613.95 ; LED142.5@1015.16,295.32 cw(c1031.02,286.17) 1026.28,303.86 ; LED142.5@1015.16,307.82 ccw(c1031.02,316.98) 1026.28,299.29 ; LED130.5@1015.16,595.32 cw(c1031.02,586.17) 1026.28,603.86 ; LED130.5@1015.16,607.82 ccw(c1031.02,616.98) 1026.28,599.29 ; LED118.5@1015.16,895.32 cw(c1031.02,886.17) 1026.28,903.86 ; LED118.5@1015.16,907.82 ccw(c1031.02,916.98) 1026.28,899.29 ; LED106.5@1015.16,1195.32 cw(c1031.02,1186.17) 1026.28,1203.86 ; LED106.5@1015.16,1207.82 ccw(c1031.02,1216.98) 1026.28,1199.29 ; LED94.5@1015.16,1495.32 cw(c1031.02,1486.17) 1026.28,1503.86 ; LED94.5@1015.16,1507.82 ccw(c1031.02,1516.98) 1026.28,1499.29 ; LED82.5@1015.16,1795.32 cw(c1031.02,1786.17) 1026.28,1803.86 ; LED82.5@1015.16,1807.82 ccw(c1031.02,1816.98) 1026.28,1799.29 ; LED70.5@1015.16,2095.32 cw(c1031.02,2086.17) 1026.28,2103.86 ; LED70.5@1015.16,2107.82 ccw(c1031.02,2116.98) 1026.28,2099.29 ; LED58.5@1015.16,2395.32 cw(c1031.02,2386.17) 1026.28,2403.86 ; LED58.5@1015.16,2407.82 ccw(c1031.02,2416.98) 1026.28,2399.29 ; LED46.5@1015.16,2695.32 cw(c1031.02,2686.17) 1026.28,2703.86 ; LED46.5@1015.16,2707.82 ccw(c1031.02,2716.98) 1026.28,2699.29 ; LED34.5@1015.16,2995.32 cw(c1031.02,2986.17) 1026.28,3003.86 ; LED34.5@1015.16,3007.82 ccw(c1031.02,3016.98) 1026.28,2999.29 ; LED22.5@1015.16,3295.32 cw(c1031.02,3286.17) 1026.28,3303.86 ; LED22.5@1015.16,3307.82 ccw(c1031.02,3316.98) 1026.28,3299.29 ; LED10.5@1015.16,3595.32 cw(c1031.02,3586.17) 1026.28,3603.86 ; LED10.5@1015.16,3607.82 ccw(c1031.02,3616.98) 1026.28,3599.29 ; LED142.5@1016.56,293.41 cw(c1024.87,290.57) 1027.15,299.06 ; LED142.5@1016.56,309.74 ccw(c1024.87,312.58) 1027.15,304.09 ; LED130.5@1016.56,593.41 cw(c1024.87,590.57) 1027.15,599.06 ; LED130.5@1016.56,609.74 ccw(c1024.87,612.58) 1027.15,604.09 ; LED118.5@1016.56,893.41 cw(c1024.87,890.57) 1027.15,899.06 ; LED118.5@1016.56,909.74 ccw(c1024.87,912.58) 1027.15,904.09 ; LED106.5@1016.56,1193.41 cw(c1024.87,1190.57) 1027.15,1199.06 ; LED106.5@1016.56,1209.74 ccw(c1024.87,1212.58) 1027.15,1204.09 ; LED94.5@1016.56,1493.41 cw(c1024.87,1490.57) 1027.15,1499.06 ; LED94.5@1016.56,1509.74 ccw(c1024.87,1512.58) 1027.15,1504.09 ; LED82.5@1016.56,1793.41 cw(c1024.87,1790.57) 1027.15,1799.06 ; LED82.5@1016.56,1809.74 ccw(c1024.87,1812.58) 1027.15,1804.09 ; LED70.5@1016.56,2093.41 cw(c1024.87,2090.57) 1027.15,2099.06 ; LED70.5@1016.56,2109.74 ccw(c1024.87,2112.58) 1027.15,2104.09 ; LED58.5@1016.56,2393.41 cw(c1024.87,2390.57) 1027.15,2399.06 ; LED58.5@1016.56,2409.74 ccw(c1024.87,2412.58) 1027.15,2404.09 ; LED46.5@1016.56,2693.41 cw(c1024.87,2690.57) 1027.15,2699.06 ; LED46.5@1016.56,2709.74 ccw(c1024.87,2712.58) 1027.15,2704.09 ; LED34.5@1016.56,2993.41 cw(c1024.87,2990.57) 1027.15,2999.06 ; LED34.5@1016.56,3009.74 ccw(c1024.87,3012.58) 1027.15,3004.09 ; LED22.5@1016.56,3293.41 cw(c1024.87,3290.57) 1027.15,3299.06 ; LED22.5@1016.56,3309.74 ccw(c1024.87,3312.58) 1027.15,3304.09 ; LED10.5@1016.56,3593.41 cw(c1024.87,3590.57) 1027.15,3599.06 ; LED10.5@1016.56,3609.74 ccw(c1024.87,3612.58) 1027.15,3604.09 ; LED142.4@1047.63,289.2 ccw(c1017.75,259.33) 1017.75,301.57 ccw(c1017.75,343.82) LED142.4@1047.63,313.95 ; LED130.4@1047.63,589.2 ccw(c1017.75,559.33) 1017.75,601.57 ccw(c1017.75,643.82) LED130.4@1047.63,613.95 ; LED118.4@1047.63,889.2 ccw(c1017.75,859.33) 1017.75,901.57 ccw(c1017.75,943.82) LED118.4@1047.63,913.95 ; LED106.4@1047.63,1189.2 ccw(c1017.75,1159.33) 1017.75,1201.57 ccw(c1017.75,1243.82) LED106.4@1047.63,1213.95 ; LED94.4@1047.63,1489.2 ccw(c1017.75,1459.33) 1017.75,1501.57 ccw(c1017.75,1543.82) LED94.4@1047.63,1513.95 ; LED82.4@1047.63,1789.2 ccw(c1017.75,1759.33) 1017.75,1801.57 ccw(c1017.75,1843.82) LED82.4@1047.63,1813.95 ; LED70.4@1047.63,2089.2 ccw(c1017.75,2059.33) 1017.75,2101.57 ccw(c1017.75,2143.82) LED70.4@1047.63,2113.95 ; LED58.4@1047.63,2389.2 ccw(c1017.75,2359.33) 1017.75,2401.57 ccw(c1017.75,2443.82) LED58.4@1047.63,2413.95 ; LED46.4@1047.63,2689.2 ccw(c1017.75,2659.33) 1017.75,2701.57 ccw(c1017.75,2743.82) LED46.4@1047.63,2713.95 ; LED34.4@1047.63,2989.2 ccw(c1017.75,2959.33) 1017.75,3001.57 ccw(c1017.75,3043.82) LED34.4@1047.63,3013.95 ; LED22.4@1047.63,3289.2 ccw(c1017.75,3259.33) 1017.75,3301.57 ccw(c1017.75,3343.82) LED22.4@1047.63,3313.95 ; LED10.4@1047.63,3589.2 ccw(c1017.75,3559.33) 1017.75,3601.57 ccw(c1017.75,3643.82) LED10.4@1047.63,3613.95 ; LED142.4@1060,321.57 ccw(c1060,369.86) 1094.14,335.72 ; LED130.4@1060,621.57 ccw(c1060,669.86) 1094.14,635.72 ; LED118.4@1060,921.57 ccw(c1060,969.86) 1094.14,935.72 ; LED106.4@1060,1221.57 ccw(c1060,1269.86) 1094.14,1235.72 ; LED94.4@1060,1521.57 ccw(c1060,1569.86) 1094.14,1535.72 ; LED82.4@1060,1821.57 ccw(c1060,1869.86) 1094.14,1835.72 ; LED70.4@1060,2121.57 ccw(c1060,2169.86) 1094.14,2135.72 ; LED58.4@1060,2421.57 ccw(c1060,2469.86) 1094.14,2435.72 ; LED46.4@1060,2721.57 ccw(c1060,2769.86) 1094.14,2735.72 ; LED34.4@1060,3021.57 ccw(c1060,3069.86) 1094.14,3035.72 ; LED22.4@1060,3321.57 ccw(c1060,3369.86) 1094.14,3335.72 ; LED10.4@1060,3621.57 ccw(c1060,3669.86) 1094.14,3635.72 ; LED142.4@1077.5,304.07 cw(c1113.71,304.07) 1088.11,329.68 ; LED130.4@1077.5,604.07 cw(c1113.71,604.07) 1088.11,629.68 ; LED118.4@1077.5,904.07 cw(c1113.71,904.07) 1088.11,929.68 ; LED106.4@1077.5,1204.07 cw(c1113.71,1204.07) 1088.11,1229.68 ; LED94.4@1077.5,1504.07 cw(c1113.71,1504.07) 1088.11,1529.68 ; LED82.4@1077.5,1804.07 cw(c1113.71,1804.07) 1088.11,1829.68 ; LED70.4@1077.5,2104.07 cw(c1113.71,2104.07) 1088.11,2129.68 ; LED58.4@1077.5,2404.07 cw(c1113.71,2404.07) 1088.11,2429.68 ; LED46.4@1077.5,2704.07 cw(c1113.71,2704.07) 1088.11,2729.68 ; LED34.4@1077.5,3004.07 cw(c1113.71,3004.07) 1088.11,3029.68 ; LED22.4@1077.5,3304.07 cw(c1113.71,3304.07) 1088.11,3329.68 ; LED10.4@1077.5,3604.07 cw(c1113.71,3604.07) 1088.11,3629.68 ; 1323.79,657.5 ccw(c1323.79,696.21) v1@1351.16,668.84 ; 1323.79,957.5 ccw(c1323.79,996.21) v1@1351.16,968.84 ; 1323.79,1257.5 ccw(c1323.79,1296.21) v1@1351.16,1268.84 ; 1323.79,1557.5 ccw(c1323.79,1596.21) v1@1351.16,1568.84 ; 1323.79,1857.5 ccw(c1323.79,1896.21) v1@1351.16,1868.84 ; 1323.79,2157.5 ccw(c1323.79,2196.21) v1@1351.16,2168.84 ; 1323.79,2457.5 ccw(c1323.79,2496.21) v1@1351.16,2468.84 ; 1323.79,2757.5 ccw(c1323.79,2796.21) v1@1351.16,2768.84 ; 1323.79,3057.5 ccw(c1323.79,3096.21) v1@1351.16,3068.84 ; 1323.79,3357.5 ccw(c1323.79,3396.21) v1@1351.16,3368.84 ; 1323.79,3657.5 ccw(c1323.79,3696.21) v1@1351.16,3668.84 ; 1335.86,657.5 cw(c1335.86,635.86) v1@1351.16,651.16 ; 1335.86,957.5 cw(c1335.86,935.86) v1@1351.16,951.16 ; 1335.86,1257.5 cw(c1335.86,1235.86) v1@1351.16,1251.16 ; 1335.86,1557.5 cw(c1335.86,1535.86) v1@1351.16,1551.16 ; 1335.86,1857.5 cw(c1335.86,1835.86) v1@1351.16,1851.16 ; 1335.86,2157.5 cw(c1335.86,2135.86) v1@1351.16,2151.16 ; 1335.86,2457.5 cw(c1335.86,2435.86) v1@1351.16,2451.16 ; 1335.86,2757.5 cw(c1335.86,2735.86) v1@1351.16,2751.16 ; 1335.86,3057.5 cw(c1335.86,3035.86) v1@1351.16,3051.16 ; 1335.86,3357.5 cw(c1335.86,3335.86) v1@1351.16,3351.16 ; 1335.86,3657.5 cw(c1335.86,3635.86) v1@1351.16,3651.16 ; v1@1347.5,390 cw(c1317.32,390) 1338.66,368.66 cw(c1360,347.32) v1@1360,377.5